# Altium PCB CCZynq.PcbDoc
Units mil, origin at the board's own origin, x right, y up, seen from the top; angles counter-clockwise.
Board outline 6000 x 4000 mil, 2 copper layers (Top Layer, Bottom Layer); 90 components, 76 nets, 723 pads, 0 vias.
Unrouted connection lines stored in the file: 337.
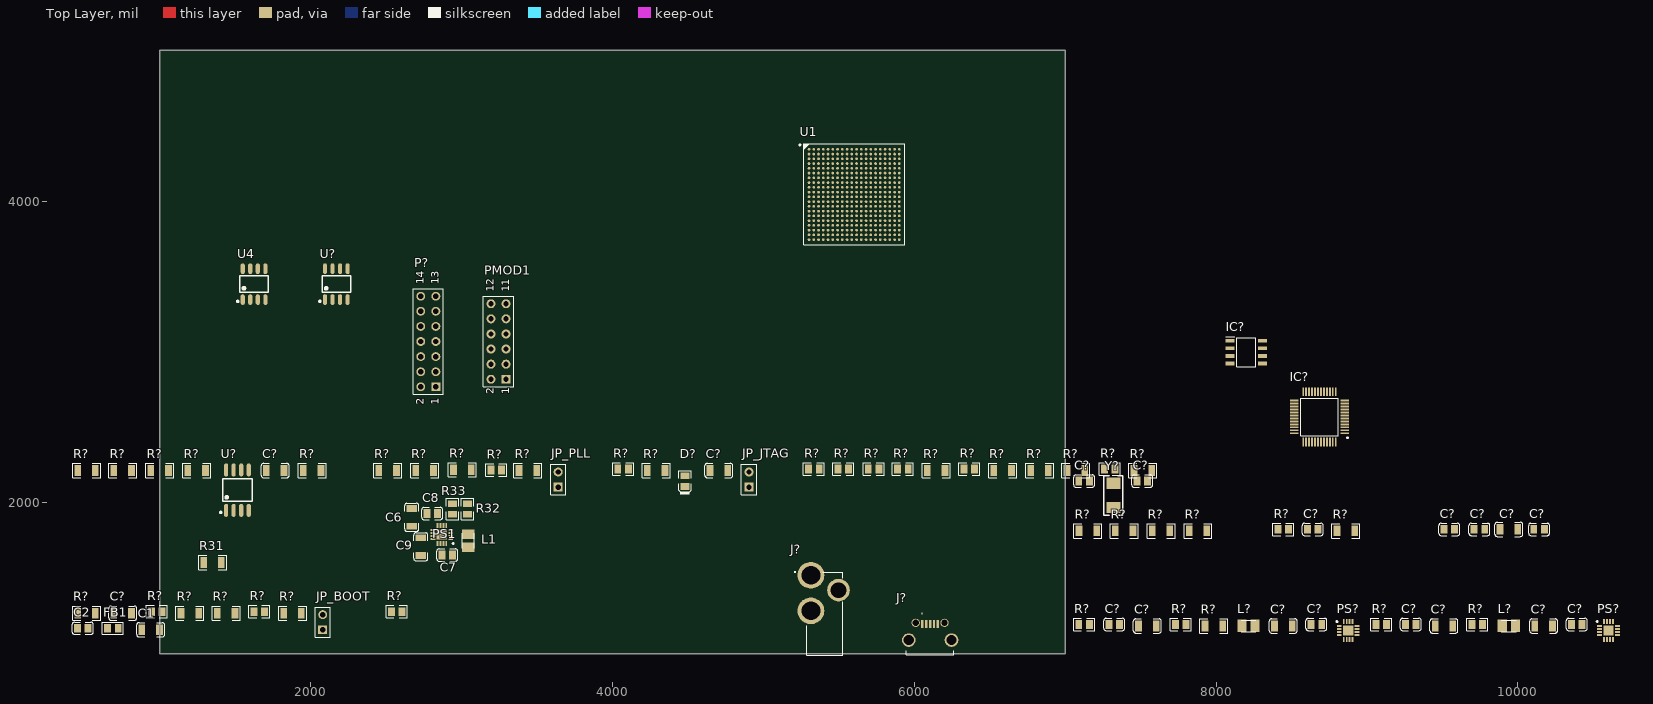
[diagram p0: Top Layer view]
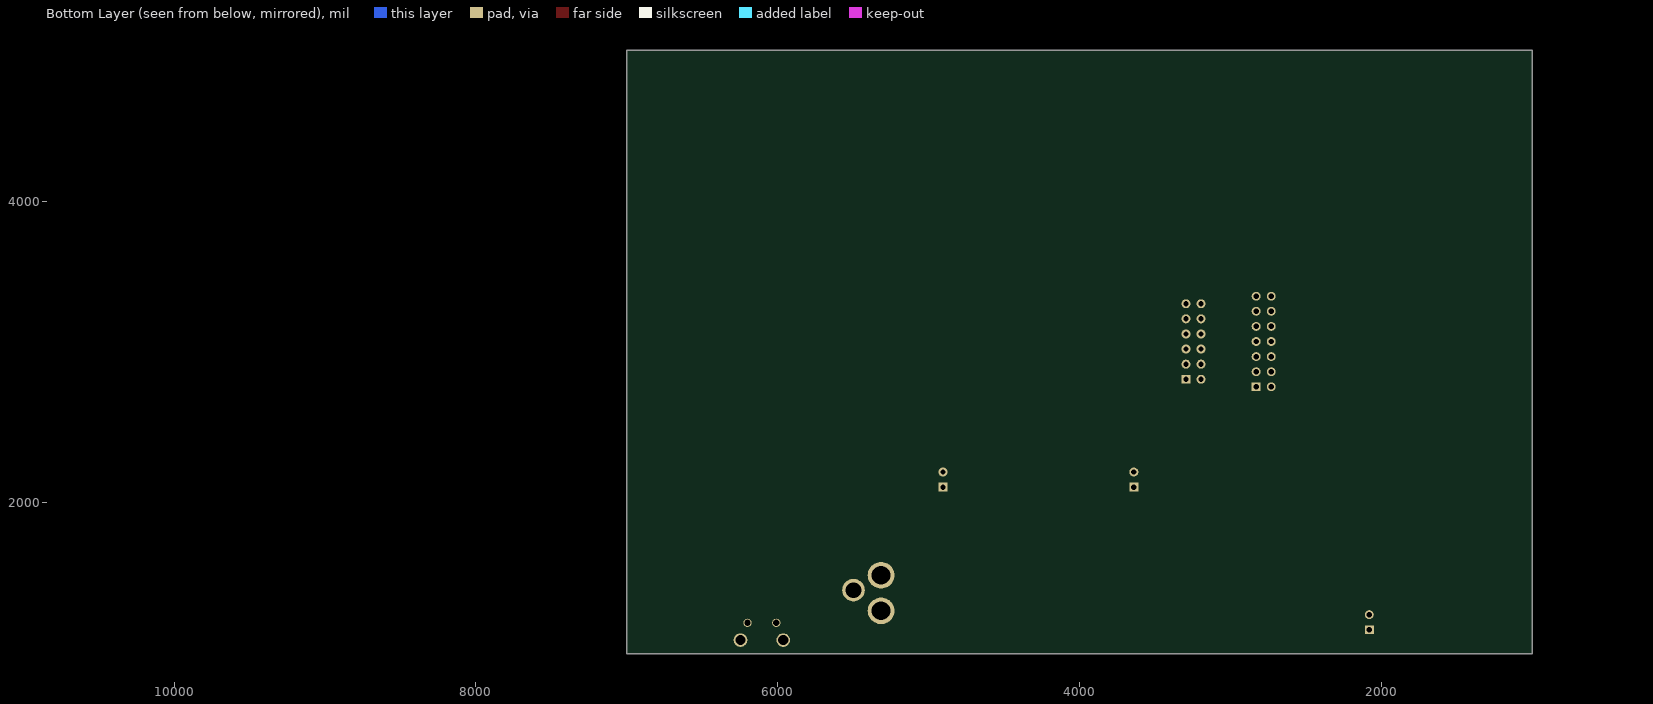
[diagram p1: Bottom Layer view, seen from below]

## Layer stack, top to bottom
Top Solder: solder mask 0.4, Solder Resist, Dk 3.5
Top Layer: signal copper 1.4
Dielectric 1: dielectric 12.6, FR-4, Dk 4.8
Bottom Layer: signal copper 1.4
Bottom Solder: solder mask 0.4, Solder Resist, Dk 3.5

## Board outline
1000,1000 7000,1000 7000,5000 1000,5000

## Design rules (kind name [scope] priority, off if disabled: settings)
Clearance [All] p1: gap=8 ignorepadtopadclearanceinfootprint=TRUE except(0: Arc-Hole Track-Hole SMDPad-Hole THPad-Hole Via-Hole Fill-Hole Poly-Hole Region-Hole Text-Hole)
DiffPairsRouting [All] p1: maxlimit=10 minlimit=10 mostfreqgap=10 toplayer_minwidth=15 toplayer_maxwidth=15 toplayer_prefwidth=15 bottomlayer_minwidth=15 bottomlayer_maxwidth=15 bottomlayer_prefwidth=15 maxuncoupledlength=500
HoleToHoleClearance [All] p1: gap=8 allowstackedmicrovias=TRUE
PolygonConnect [All] p1: connectstyle=Relief reliefconductorwidth=10 reliefentries=4 polygonreliefangle="90 Angle" airgapwidth=10
RoutingVias [All] p1: holewidth=28 width=50 viastyle="Through Hole" minholewidth=28 minwidth=50 maxholewidth=28 maxwidth=50
SilkToSilkClearance [All] p1: silktosilkclearance=0
SilkToSolderMaskClearance [IsPad] p1: minsilkscreentomaskgap=0 clearancetoexposedcopper=TRUE
SolderMaskExpansion [All] p1: expansion=4
Width [All] p1: maxlimit=50 minlimit=8 preferedwidth=8
26 further rules are at their usual default settings.

## Classes and differential pairs
component class Sheet5: C? IC? J? PMOD1 R? U4 Y?
component class Sheet4: C6 C7 C8 C9 C? J? L1 L? PS1 PS? R31 R32 R33 R?
component class Sheet3: U1
component class Sheet1: C1 C2 FB1
component class Sheet2: C? D? JP_BOOT JP_JTAG JP_PLL P? R? U?
differential pair NetC?_2: +NetC?_2 -NetC?_2

## Components (designator, comment, footprint, x,y, rotation, side; value= is the part's Value field where it differs from the comment)
C1 "100nF" 1206_C 940,1160 r0 top
C2 "47uF" 0805_C 490,1170 r0 top
C6 "100nF" 1206_C 2670,1905 r270 top
C7 "22uF" 0805_C 2905,1655 r0 top
C8 "3.3nF" 0805_C 2805,1930 r180 top
C9 "10uF" 1206_C 2730,1710 r90 top
C? "27pF" 0805_C 7510,2145 r0 top
C? "27pF" 0805_C 7125,2145 r0 top
C? "100nF" 1206_C 10170,1185 r0 top
C? "22uF" 0805_C 10390,1195 r0 top
C? "10uF" 1206_C 9510,1185 r0 top
C? "3.3nF" 0805_C 9290,1195 r0 top
C? "100nF" 1206_C 8445,1185 r0 top
C? "22uF" 0805_C 8665,1195 r0 top
C? "10uF" 1206_C 7545,1185 r0 top
C? "3.3nF" 0805_C 7325,1195 r0 top
C? "10uF" 1206_C 9940,1825 r0 top
C? "100nF" 0805_C 9745,1825 r0 top
C? "100nF" 0805_C 9545,1825 r0 top
C? "100nF" 0805_C 10140,1825 r0 top
C? "100nF" 0805_C 8640,1825 r0 top
C? "100nF" 1206_C 755,1270 r0 top
C? "100nF" 1206_C 1765,2215 r0 top
C? "100nF" 1206_C 4705,2215 r0 top
D? "翠绿 0805" 0805_LED_S1 4480,2145 r90 top
FB1 "600Ω ±25% 100MHz" 0805_L 690,1170 r0 top
IC? "93LC56B-I_SN" SOIC127P600X175-8N 8200,3000 r0 top
IC? "FT232HL-TRAY" QFP50P900X900X160-48N 8685,2570 r180 top
J? "DC-005-20A" DC00520A 5315,1521.22 r90 top
J? "U254-051T-4BHJ25-S2S" U254051T4BHJ25S2S 6105,1170 r0 top
JP_BOOT "Header 2" HDR1X2 2080,1160 r90 top
JP_JTAG "Header 2" HDR1X2 4905,2105 r90 top
JP_PLL "Header 2" HDR1X2 3640,2105 r90 top
L1 "252012CDMCDS2R2MC" INDPM2520X120N 3045,1750 r90 top
L? "252012CDMCDS2R2MC" INDPM2520X120N 9940,1185 r0 top
L? "252012CDMCDS2R2MC" INDPM2520X120N 8215,1185 r0 top
P? "JTAG Header" HDR2X7 2830,2770 r90 top
PMOD1 "Header 6X2" HDR2X6 3295,2820 r90 top
PS1 "TLV62130RGTR" QFN50P300X300X100-17N-D 2869.84,1790.94 r180 top
PS? "TLV62130RGTR" QFN50P300X300X100-17N-D 10600,1155 r0 top
PS? "TLV62130RGTR" QFN50P300X300X100-17N-D 8875,1155 r0 top
R31 "10KΩ" 1206_R 1350,1605 r0 top
R32 "4.99KΩ" 0805_R 3040,1960.04 r90 top
R33 "20KΩ" 0805_R 2940,1959.96 r270 top
R? "56.2KΩ" 0805_R 9730,1195 r0 top
R? "18KΩ" 0805_R 9095,1195 r0 top
R? "18.7KΩ" 0805_R 7765,1195 r0 top
R? "15KΩ" 0805_R 7125,1195 r0 top
R? "10KΩ" 1206_R 7985,1185 r0 top
R? "12.1KΩ" 0805_R 8445,1825 r0 top
R? "10KΩ" 1206_R 8860,1815 r0 top
R? "22Ω" 1206_R 7150,1815 r0 top
R? "22Ω" 1206_R 7880,1815 r0 top
R? "22Ω" 1206_R 7635,1815 r0 top
R? "22Ω" 1206_R 7390,1815 r0 top
R? "1KΩ" 1206_R 1880,1270 r0 top
R? "20KΩ" 0805_R 1660,1280 r0 top
R? "20KΩ" 0805_R 2570,1280 r0 top
R? "100KΩ" 1206_R 515,1270 r0 top
R? "33Ω" 0805_R 980,1280 r0 top
R? "10KΩ" 1206_R 1200,1270 r0 top
R? "10KΩ" 1206_R 1440,1270 r0 top
R? "100KΩ" 1206_R 6585,2215 r0 top
R? "20KΩ" 0805_R 5530,2225 r0 top
R? "4.7KΩ" 1206_R 2010,2215 r0 top
R? "20KΩ" 0805_R 3230,2218.86 r0 top
R? "1KΩ" 1206_R 3440,2215 r0 top
R? "4.7KΩ" 1206_R 3005,2220 r0 top
R? "1KΩ" 1206_R 4290,2215 r0 top
R? "20KΩ" 0805_R 4070,2225 r0 top
R? "20KΩ" 0805_R 5925,2225 r0 top
R? "4.7KΩ" 1206_R 2755,2215 r0 top
R? "20KΩ" 0805_R 6365,2225 r0 top
R? "47Ω" 0805_R 5335,2225 r0 top
R? "4.7KΩ" 1206_R 6145,2215 r0 top
R? "100KΩ" 1206_R 6830,2215 r0 top
R? "100KΩ" 1206_R 7515,2215 r0 top
R? "4.7KΩ" 1206_R 2510,2215 r0 top
R? "22Ω" 1206_R 515,2215 r0 top
R? "22Ω" 1206_R 1000,2215 r0 top
R? "4.7KΩ" 1206_R 7070,2215 r0 top
R? "330Ω" 0805_R 5730,2225 r0 top
R? "330Ω" 0805_R 7295,2225 r0 top
R? "22Ω" 1206_R 1245,2215 r0 top
R? "22Ω" 1206_R 755,2215 r0 top
U1 "XC7Z010-1CLG400I" CLG400 5601.77,4044.25 r0 top
U4 "ESP-PSRAM-64H" SOIC-8_150mil 1625,3450 r0 top
U? "W25Q128JVSIQTR" SOIC-8_208mil 1515,2085 r0 top
U? "SGM706-SYS8" SOIC-8_150mil 2170,3450 r0 top
Y? "12MHz" SMD-5032_2P 7320,2050 r90 top

## Footprints (in the part's own frame and the unit in brackets; to place one, negate y for a bottom-side part, rotate by r counter-clockwise, add the part's x,y. Pads: shape width x height; smd on the part's side, far side on the other; paste and mask are expansions set on the pad)
0805_C [mm]
  rect 1.16x1.47 smd: 1(-0.89,0) 2(0.89,0)
  silkscreen extent -1.77,-1.04 1.77,1.04, body extent -1,-0.62 1,0.63, height 0.77
0805_L [mm]
  rect 1.16x1.47 smd: 1(-0.89,0) 2(0.89,0)
  silkscreen extent -1.77,-1.04 1.77,1.03, body extent -1.02,-0.64 1.03,0.64, height 0.6
0805_LED_S1 [mm]
  rect 1.16x1.47 smd: A(0.89,0) K(-0.89,0)
  silkscreen extent -2.24,-1.04 1.77,1.03, body extent -1.01,-0.62 1.01,0.62, height 1.1
0805_R [mm]
  rect 1.16x1.47 smd: 1(-0.89,0) 2(0.89,0)
  silkscreen extent -1.77,-1.04 1.77,1.03, body extent -1,-0.62 1,0.63, height 0.49
1206_C [mm]
  rect 1.13x1.8 smd: 1(-1.49,0) 2(1.49,0)
  silkscreen extent -2.36,-1.2 2.35,1.2, body extent -1.6,-0.81 1.6,0.79, height 1
1206_R [mm]
  rect 1.13x1.8 smd: 1(-1.49,0) 2(1.49,0)
  silkscreen extent -2.36,-1.2 2.35,1.2, body extent -1.7,-0.86 1.65,0.87, height 0.85
CLG400 [mm] "BGA, 400-Balls, Body 17x17mm, Pitch 0.8mm"
  round 0.45 smd: A1(-7.6,7.6) A2(-6.8,7.6) A3(-6,7.6) A4(-5.2,7.6) A5(-4.4,7.6) A6(-3.6,7.6) A7(-2.8,7.6) A8(-2,7.6) A9(-1.2,7.6) A10(-0.4,7.6) A11(0.4,7.6) A12(1.2,7.6) A13(2,7.6) A14(2.8,7.6) A15(3.6,7.6) A16(4.4,7.6) A17(5.2,7.6) A18(6,7.6) A19(6.8,7.6) A20(7.6,7.6) B1(-7.6,6.8) B2(-6.8,6.8) B3(-6,6.8) B4(-5.2,6.8) B5(-4.4,6.8) B6(-3.6,6.8) B7(-2.8,6.8) B8(-2,6.8) B9(-1.2,6.8) B10(-0.4,6.8) B11(0.4,6.8) B12(1.2,6.8) B13(2,6.8) B14(2.8,6.8) B15(3.6,6.8) B16(4.4,6.8) B17(5.2,6.8) B18(6,6.8) B19(6.8,6.8) B20(7.6,6.8) C1(-7.6,6) C2(-6.8,6) C3(-6,6) C4(-5.2,6) C5(-4.4,6) C6(-3.6,6) C7(-2.8,6) C8(-2,6) C9(-1.2,6) C10(-0.4,6) C11(0.4,6) C12(1.2,6) C13(2,6) C14(2.8,6) C15(3.6,6) C16(4.4,6) C17(5.2,6) C18(6,6) C19(6.8,6) C20(7.6,6) D1(-7.6,5.2) D2(-6.8,5.2) D3(-6,5.2) D4(-5.2,5.2) D5(-4.4,5.2) D6(-3.6,5.2) D7(-2.8,5.2) D8(-2,5.2) D9(-1.2,5.2) D10(-0.4,5.2) D11(0.4,5.2) D12(1.2,5.2) D13(2,5.2) D14(2.8,5.2) D15(3.6,5.2) D16(4.4,5.2) D17(5.2,5.2) D18(6,5.2) D19(6.8,5.2) D20(7.6,5.2) E1(-7.6,4.4) E2(-6.8,4.4) E3(-6,4.4) E4(-5.2,4.4) E5(-4.4,4.4) E6(-3.6,4.4) E7(-2.8,4.4) E8(-2,4.4) E9(-1.2,4.4) E10(-0.4,4.4) E11(0.4,4.4) E12(1.2,4.4) E13(2,4.4) E14(2.8,4.4) E15(3.6,4.4) E16(4.4,4.4) E17(5.2,4.4) E18(6,4.4) E19(6.8,4.4) E20(7.6,4.4) F1(-7.6,3.6) F2(-6.8,3.6) F3(-6,3.6) F4(-5.2,3.6) F5(-4.4,3.6) F6(-3.6,3.6) F7(-2.8,3.6) F8(-2,3.6) F9(-1.2,3.6) F10(-0.4,3.6) F11(0.4,3.6) F12(1.2,3.6) F13(2,3.6) F14(2.8,3.6) F15(3.6,3.6) F16(4.4,3.6) F17(5.2,3.6) F18(6,3.6) F19(6.8,3.6) F20(7.6,3.6) G1(-7.6,2.8) G2(-6.8,2.8) G3(-6,2.8) G4(-5.2,2.8) G5(-4.4,2.8) G6(-3.6,2.8) G7(-2.8,2.8) G8(-2,2.8) G9(-1.2,2.8) G10(-0.4,2.8) G11(0.4,2.8) G12(1.2,2.8) G13(2,2.8) G14(2.8,2.8) G15(3.6,2.8) G16(4.4,2.8) G17(5.2,2.8) G18(6,2.8) G19(6.8,2.8) G20(7.6,2.8) H1(-7.6,2) H2(-6.8,2) H3(-6,2) H4(-5.2,2) H5(-4.4,2) H6(-3.6,2) H7(-2.8,2) H8(-2,2) H9(-1.2,2) H10(-0.4,2) H11(0.4,2) H12(1.2,2) H13(2,2) H14(2.8,2) H15(3.6,2) H16(4.4,2) H17(5.2,2) H18(6,2) H19(6.8,2) H20(7.6,2) J1(-7.6,1.2) J2(-6.8,1.2) J3(-6,1.2) J4(-5.2,1.2) J5(-4.4,1.2) J6(-3.6,1.2) J7(-2.8,1.2) J8(-2,1.2) J9(-1.2,1.2) J10(-0.4,1.2) J11(0.4,1.2) J12(1.2,1.2) J13(2,1.2) J14(2.8,1.2) J15(3.6,1.2) J16(4.4,1.2) J17(5.2,1.2) J18(6,1.2) J19(6.8,1.2) J20(7.6,1.2) K1(-7.6,0.4) K2(-6.8,0.4) K3(-6,0.4) K4(-5.2,0.4) K5(-4.4,0.4) K6(-3.6,0.4) K7(-2.8,0.4) K8(-2,0.4) K9(-1.2,0.4) K10(-0.4,0.4) K11(0.4,0.4) K12(1.2,0.4) K13(2,0.4) K14(2.8,0.4) K15(3.6,0.4) K16(4.4,0.4) K17(5.2,0.4) K18(6,0.4) K19(6.8,0.4) K20(7.6,0.4) L1(-7.6,-0.4) L2(-6.8,-0.4) L3(-6,-0.4) L4(-5.2,-0.4) L5(-4.4,-0.4) L6(-3.6,-0.4) L7(-2.8,-0.4) L8(-2,-0.4) L9(-1.2,-0.4) L10(-0.4,-0.4) L11(0.4,-0.4) L12(1.2,-0.4) L13(2,-0.4) L14(2.8,-0.4) L15(3.6,-0.4) L16(4.4,-0.4) L17(5.2,-0.4) L18(6,-0.4) L19(6.8,-0.4) L20(7.6,-0.4) M1(-7.6,-1.2) M2(-6.8,-1.2) M3(-6,-1.2) M4(-5.2,-1.2) M5(-4.4,-1.2) M6(-3.6,-1.2) M7(-2.8,-1.2) M8(-2,-1.2) M9(-1.2,-1.2) M10(-0.4,-1.2) M11(0.4,-1.2) M12(1.2,-1.2) M13(2,-1.2) M14(2.8,-1.2) M15(3.6,-1.2) M16(4.4,-1.2) M17(5.2,-1.2) M18(6,-1.2) M19(6.8,-1.2) M20(7.6,-1.2) N1(-7.6,-2) N2(-6.8,-2) N3(-6,-2) N4(-5.2,-2) N5(-4.4,-2) N6(-3.6,-2) N7(-2.8,-2) N8(-2,-2) N9(-1.2,-2) N10(-0.4,-2) N11(0.4,-2) N12(1.2,-2) N13(2,-2) N14(2.8,-2) N15(3.6,-2) N16(4.4,-2) N17(5.2,-2) N18(6,-2) N19(6.8,-2) N20(7.6,-2) P1(-7.6,-2.8) P2(-6.8,-2.8) P3(-6,-2.8) P4(-5.2,-2.8) P5(-4.4,-2.8) P6(-3.6,-2.8) P7(-2.8,-2.8) P8(-2,-2.8) P9(-1.2,-2.8) P10(-0.4,-2.8) P11(0.4,-2.8) P12(1.2,-2.8) P13(2,-2.8) P14(2.8,-2.8) P15(3.6,-2.8) P16(4.4,-2.8) P17(5.2,-2.8) P18(6,-2.8) P19(6.8,-2.8) P20(7.6,-2.8) R1(-7.6,-3.6) R2(-6.8,-3.6) R3(-6,-3.6) R4(-5.2,-3.6) R5(-4.4,-3.6) R6(-3.6,-3.6) R7(-2.8,-3.6) R8(-2,-3.6) R9(-1.2,-3.6) R10(-0.4,-3.6) R11(0.4,-3.6) R12(1.2,-3.6) R13(2,-3.6) R14(2.8,-3.6) R15(3.6,-3.6) R16(4.4,-3.6) R17(5.2,-3.6) R18(6,-3.6) R19(6.8,-3.6) R20(7.6,-3.6) T1(-7.6,-4.4) T2(-6.8,-4.4) T3(-6,-4.4) T4(-5.2,-4.4) T5(-4.4,-4.4) T6(-3.6,-4.4) T7(-2.8,-4.4) T8(-2,-4.4) T9(-1.2,-4.4) T10(-0.4,-4.4) T11(0.4,-4.4) T12(1.2,-4.4) T13(2,-4.4) T14(2.8,-4.4) T15(3.6,-4.4) T16(4.4,-4.4) T17(5.2,-4.4) T18(6,-4.4) T19(6.8,-4.4) T20(7.6,-4.4) U1(-7.6,-5.2) U2(-6.8,-5.2) U3(-6,-5.2) U4(-5.2,-5.2) U5(-4.4,-5.2) U6(-3.6,-5.2) U7(-2.8,-5.2) U8(-2,-5.2) U9(-1.2,-5.2) U10(-0.4,-5.2) U11(0.4,-5.2) U12(1.2,-5.2) U13(2,-5.2) U14(2.8,-5.2) U15(3.6,-5.2) U16(4.4,-5.2) U17(5.2,-5.2) U18(6,-5.2) U19(6.8,-5.2) U20(7.6,-5.2) V1(-7.6,-6) V2(-6.8,-6) V3(-6,-6) V4(-5.2,-6) V5(-4.4,-6) V6(-3.6,-6) V7(-2.8,-6) V8(-2,-6) V9(-1.2,-6) V10(-0.4,-6) V11(0.4,-6) V12(1.2,-6) V13(2,-6) V14(2.8,-6) V15(3.6,-6) V16(4.4,-6) V17(5.2,-6) V18(6,-6) V19(6.8,-6) V20(7.6,-6) W1(-7.6,-6.8) W2(-6.8,-6.8) W3(-6,-6.8) W4(-5.2,-6.8) W5(-4.4,-6.8) W6(-3.6,-6.8) W7(-2.8,-6.8) W8(-2,-6.8) W9(-1.2,-6.8) W10(-0.4,-6.8) W11(0.4,-6.8) W12(1.2,-6.8) W13(2,-6.8) W14(2.8,-6.8) W15(3.6,-6.8) W16(4.4,-6.8) W17(5.2,-6.8) W18(6,-6.8) W19(6.8,-6.8) W20(7.6,-6.8) Y1(-7.6,-7.6) Y2(-6.8,-7.6) Y3(-6,-7.6) Y4(-5.2,-7.6) Y5(-4.4,-7.6) Y6(-3.6,-7.6) Y7(-2.8,-7.6) Y8(-2,-7.6) Y9(-1.2,-7.6) Y10(-0.4,-7.6) Y11(0.4,-7.6) Y12(1.2,-7.6) Y13(2,-7.6) Y14(2.8,-7.6) Y15(3.6,-7.6) Y16(4.4,-7.6) Y17(5.2,-7.6) Y18(6,-7.6) Y19(6.8,-7.6) Y20(7.6,-7.6)
  silkscreen extent -9.27,-8.5 8.5,8.5, body extent -8.5,-8.5 8.5,8.5, height 1.6
DC00520A [mm]
  round 4.5 hole 3.15: 1(0,0) 2(-6,0)
  round 3.8 hole 2.625: 3(-2.5,-4.65)
  silkscreen extent -13.5,-5.33 0.6,2.72, body extent -13.5,-5.86 1.48,1.47, height 11.1
HDR1X2 [mm] "Connector; Header; 2 Position"
  rect 1.5x1.5 hole 0.9: 1(0,0)
  round 1.5 hole 0.9: 2(2.54,0)
  silkscreen extent -1.27,-1.27 3.81,1.27
HDR2X6 [mm] "Connector; Header; 6x2 Position"
  rect 1.5x1.5 hole 0.9: 1(0,0)
  round 1.5 hole 0.9: 2(0,2.54) 3(2.54,0) 4(2.54,2.54) 5(5.08,0) 6(5.08,2.54) 7(7.62,0) 8(7.62,2.54) 9(10.16,0) 10(10.16,2.54) 11(12.7,0) 12(12.7,2.54)
  silkscreen extent -1.27,-1.27 13.97,3.81
HDR2X7 [mm] "Connector; Header; 7x2 Position"
  rect 1.5x1.5 hole 0.9: 1(0,0)
  round 1.5 hole 0.9: 2(0,2.54) 3(2.54,0) 4(2.54,2.54) 5(5.08,0) 6(5.08,2.54) 7(7.62,0) 8(7.62,2.54) 9(10.16,0) 10(10.16,2.54) 11(12.7,0) 12(12.7,2.54) 13(15.24,0) 14(15.24,2.54)
  silkscreen extent -1.27,-1.27 16.51,3.81
INDPM2520X120N [mm]
  rect 1.55x2.1 smd: 1(-1.1,0) 2(1.1,0)
  silkscreen extent -1.25,-1 1.25,1, body extent -1.25,-1 1.25,1, height 1.2
QFN50P300X300X100-17N-D [mm]
  rect 0.8x0.3 smd: 1(-1.5,0.75) 2(-1.5,0.25) 3(-1.5,-0.25) 4(-1.5,-0.75) 9(1.5,-0.75) 10(1.5,-0.25) 11(1.5,0.25) 12(1.5,0.75)
  rect 0.3x0.8 smd: 5(-0.75,-1.5) 6(-0.25,-1.5) 7(0.25,-1.5) 8(0.75,-1.5) 13(0.75,1.5) 14(0.25,1.5) 15(-0.25,1.5) 16(-0.75,1.5)
  rect 1.75x1.75 smd: 17(0,0)
  silkscreen extent -2.02,1.38 -1.78,1.62, body extent -1.55,-1.55 1.55,1.55, height 1
QFP50P900X900X160-48N [mm]
  rect 1.475x0.3 smd: 1(-4.238,2.75) 2(-4.238,2.25) 3(-4.238,1.75) 4(-4.238,1.25) 5(-4.238,0.75) 6(-4.238,0.25) 7(-4.238,-0.25) 8(-4.238,-0.75) 9(-4.238,-1.25) 10(-4.238,-1.75) 11(-4.238,-2.25) 12(-4.238,-2.75) 25(4.238,-2.75) 26(4.238,-2.25) 27(4.238,-1.75) 28(4.238,-1.25) 29(4.238,-0.75) 30(4.238,-0.25) 31(4.238,0.25) 32(4.238,0.75) 33(4.238,1.25) 34(4.238,1.75) 35(4.238,2.25) 36(4.238,2.75)
  rect 0.3x1.475 smd: 13(-2.75,-4.238) 14(-2.25,-4.238) 15(-1.75,-4.238) 16(-1.25,-4.238) 17(-0.75,-4.238) 18(-0.25,-4.238) 19(0.25,-4.238) 20(0.75,-4.238) 21(1.25,-4.238) 22(1.75,-4.238) 23(2.25,-4.238) 24(2.75,-4.238) 37(2.75,4.238) 38(2.25,4.238) 39(1.75,4.238) 40(1.25,4.238) 41(0.75,4.238) 42(0.25,4.238) 43(-0.25,4.238) 44(-0.75,4.238) 45(-1.25,4.238) 46(-1.75,4.238) 47(-2.25,4.238) 48(-2.75,4.238)
  silkscreen extent -4.85,-3.15 3.15,3.62, body extent -4.5,-4.5 4.5,4.5, height 1.6
SMD-5032_2P [mm]
  rect 1.9x2.4 smd: 1(-2.05,0) 2(2.05,0)
  silkscreen extent -3.32,-1.6 3.32,1.6
SOIC127P600X175-8N [mm]
  rect 1.525x0.65 smd: 1(-2.712,1.905) 2(-2.712,0.635) 3(-2.712,-0.635) 4(-2.712,-1.905) 5(2.712,-1.905) 6(2.712,-0.635) 7(2.712,0.635) 8(2.712,1.905)
  silkscreen extent -3.47,-2.45 1.6,2.58, body extent -3,-2.45 3,2.45, height 1.75
SOIC-8_150mil [mm]
  oval 0.7x1.8 smd: 1(-1.905,-2.6) 2(-0.635,-2.6) 3(0.635,-2.6) 4(1.905,-2.6) 5(1.905,2.6) 6(0.635,2.6) 7(-0.635,2.6) 8(-1.905,2.6)
  silkscreen extent -2.9,-3.05 2.4,1.4
SOIC-8_208mil [mm]
  oval 0.7x2.2 smd: 1(-1.905,-3.4) 2(-0.635,-3.4) 3(0.635,-3.4) 4(1.905,-3.4) 5(1.905,3.4) 6(0.635,3.4) 7(-0.635,3.4) 8(-1.905,3.4)
  silkscreen extent -2.95,-3.9 2.5,1.9
U254051T4BHJ25S2S [mm]
  rect 0.4x1.35 smd: 1(-1.3,0.675) 2(-0.65,0.675) 3(0,0.675) 4(0.65,0.675) 5(1.3,0.675)
  round 2.3 hole 1.7: MH1(-3.6,-2) MH2(3.6,-2)
  round 1.4 hole 1.07: MH3(2.425,0.9) MH4(-2.425,0.9)
  silkscreen extent -4,-4.5 4,2.55, body extent -4.34,-4.5 4.35,1.33, height 3

## Part data
C1 C6 C? C? C? C? C?: library part "1206 100nF (104) 10% 50V", "贴片电容", Package=1206, SuppliersPartNumber=C24497, ComponentLink1Description=供应商链接, ComponentLink1URL=http://www.szlcsc.com/product/details_25237.html, Supplier=LC
C2: library part "0805 47pF (470) 5% 50V", "贴片电容 47uF", Package=0805, SuppliersPartNumber=C14857, ComponentLink1Description=供应商链接, ComponentLink1URL=http://www.szlcsc.com/product/details_15529.html, Supplier=LC
C7 C? C?: library part "0805 22uF (226) 20% 25V", "贴片电容", Package=0805, SuppliersPartNumber=C45783, ComponentLink1Description=供应商链接, ComponentLink1URL=http://www.szlcsc.com/product/details_46786.html, Supplier=LC
C8 C? C?: library part "0805 3.3nF (332) 10% 50V", "贴片电容", Package=0805, SuppliersPartNumber=C53175, ComponentLink1Description=供应商链接, ComponentLink1URL=http://www.szlcsc.com/product/details_54191.html, Supplier=LC
C9 C? C? C?: library part "1206 10uF (106) 10% 50V", "贴片电容", Package=1206, SuppliersPartNumber=C13585, ComponentLink1Description=供应商链接, ComponentLink1URL=http://www.szlcsc.com/product/details_14236.html, Supplier=LC
C? C?: library part "0805 27pF (270) 5% 50V", "贴片电容", Package=0805, SuppliersPartNumber=C8031, ComponentLink1Description=供应商链接, ComponentLink1URL=http://www.szlcsc.com/product/details_8509.html, Supplier=LC
C? C? C? C?: library part "0805 100nF(104) 10% 50V", "贴片电容", Package=0805, SuppliersPartNumber=C49678, ComponentLink1Description=供应商链接, ComponentLink1URL=http://www.szlcsc.com/product/details_50686.html, Supplier=LC
D?: library part "0805 翠绿", "发光二极管", Package=0805, SuppliersPartNumber=C2297, ComponentLink1Description=供应商链接, ComponentLink1URL=http://www.szlcsc.com/product/details_2670.html, Supplier=LC
FB1: library part "0805 600Ω 25% 100MHz", "贴片磁珠", Package=0805, SuppliersPartNumber=C1017, ComponentLink1Description=供应商链接, ComponentLink1URL=http://www.szlcsc.com/product/details_1369.html, Supplier=LC
IC?: "Integrated Circuit", Arrow Part Number=93LC56B-I/SN, Manufacturer_Name=Microchip, Mouser Part Number=579-93LC56BISN, Arrow Price/Stock=https://www.arrow.com/en/products/93lc56b-isn/microchip-technology, Datasheet Link=http://ww1.microchip.com/downloads/en/DeviceDoc/21794G.pdf, Height=1.75mm, Manufacturer_Part_Number=93LC56B-I/SN, Mouser Price/Stock=https://www.mouser.co.uk/ProductDetail/Microchip-Technology/93LC56B-I-SN?qs=JhC4kYev1ubTO3jC60ECfA%3D%3D
IC?: "Integrated Circuit", Manufacturer_Name="FTDI Chip", Mouser Part Number=895-FT232HL-TRAY, Arrow Part Number=FT232HL-TRAY, Arrow Price/Stock=https://www.arrow.com/en/products/ft232hl-tray/ftdi-chip, Datasheet Link=https://www.ftdichip.com/Support/Documents/DataSheets/ICs/DS_FT232H.pdf, Height=1.6mm, Manufacturer_Part_Number=FT232HL-TRAY, Mouser Price/Stock=https://www.mouser.co.uk/ProductDetail/FTDI/FT232HL-TRAY?qs=rzPzygjq8vJvP%252BgUCAJn1A%3D%3D
J?: "Connector", Manufacturer_Name="Korean Hroparts Elec", Datasheet Link=https://datasheet.lcsc.com/szlcsc/Korean-Hroparts-Elec-DC-005-20A_C130239.pdf, Height=11mm, Manufacturer_Part_Number=DC-005-20A
J?: "Connector", Manufacturer_Name="XKB Enterprise", Datasheet Link=https://datasheet.lcsc.com/szlcsc/2002271812_XKB-Enterprise-U254-051T-4BHJ25-S2S_C319163.pdf, Height=2.9mm, Manufacturer_Part_Number=U254-051T-4BHJ25-S2S
JP_BOOT JP_JTAG JP_PLL: "Header, 2-Pin", LatestRevisionDate=17-Jul-2002, LatestRevisionNote="Re-released for DXP Platform.", Publisher="Altium Limited"
L1 L? L?: "Inductor", Manufacturer_Name=Sumida, Manufacturer_Part_Number=252012CDMCDS‐2R2MC, Datasheet Link=https://products.sumida.com/products/pdf/252012CDMCDDS%20(en).pdf, Height=1.2mm
P?: library part "Header 7X2", "Header, 7-Pin, Dual row", LatestRevisionDate=17-Jul-2002, LatestRevisionNote="Re-released for DXP Platform.", Publisher="Altium Limited"
PMOD1: "Header, 6-Pin, Dual row", LatestRevisionDate=17-Jul-2002, LatestRevisionNote="Re-released for DXP Platform.", Publisher="Altium Limited"
PS1 PS? PS?: "Power Supply", Manufacturer_Name="Texas Instruments", Mouser Part Number=595-TLV62130RGTR, Arrow Part Number=TLV62130RGTR, Arrow Price/Stock=https://www.arrow.com/en/products/tlv62130rgtr/texas-instruments, Datasheet Link=http://www.ti.com/lit/gpn/tlv62130, Height=1mm, Manufacturer_Part_Number=TLV62130RGTR, Mouser Price/Stock=https://www.mouser.co.uk/ProductDetail/Texas-Instruments/TLV62130RGTR?qs=2UFnnMkojnVB1OajUwDmow%3D%3D
R31 R? R? R? R?: library part "1206 10KΩ (1002) 1%", "贴片电阻", Package=1206, SuppliersPartNumber=C17902, ComponentLink1Description=供应商链接, ComponentLink1URL=http://www.szlcsc.com/product/details_18590.html, Supplier=LC
R32: library part "0805 4.99KΩ (4991) 1%", "贴片电阻", Package=0805, SuppliersPartNumber=C17677, ComponentLink1Description=供应商链接, ComponentLink1URL=http://www.szlcsc.com/product/details_18365.html, Supplier=LC
R33 R? R? R? R? R? R? R?: library part "0805 20KΩ (2002) 1%", "贴片电阻", Package=0805, SuppliersPartNumber=C4328, ComponentLink1Description=供应商链接, ComponentLink1URL=http://www.szlcsc.com/product/details_4735.html, Supplier=LC
R?: library part "0805 56KΩ (5602) 1%", "贴片电阻 56.2k", Package=0805, SuppliersPartNumber=C17756, ComponentLink1Description=供应商链接, ComponentLink1URL=http://www.szlcsc.com/product/details_18444.html, Supplier=LC
R?: library part "0805 18KΩ (1802) 1%", "贴片电阻", Package=0805, SuppliersPartNumber=C17506, ComponentLink1Description=供应商链接, ComponentLink1URL=http://www.szlcsc.com/product/details_18194.html, Supplier=LC
R?: library part "0805 18KΩ (1802) 1%", "贴片电阻 18.7k", Package=0805, SuppliersPartNumber=C17506, ComponentLink1Description=供应商链接, ComponentLink1URL=http://www.szlcsc.com/product/details_18194.html, Supplier=LC
R?: library part "0805 15KΩ (1502) 1%", "贴片电阻", Package=0805, SuppliersPartNumber=C17475, ComponentLink1Description=供应商链接, ComponentLink1URL=http://www.szlcsc.com/product/details_18163.html, Supplier=LC
R?: library part "0805 12KΩ (1202) 1%", "贴片电阻 12.1k", Package=0805, SuppliersPartNumber=C17444, ComponentLink1Description=供应商链接, ComponentLink1URL=http://www.szlcsc.com/product/details_18132.html, Supplier=LC
R? R? R? R? R? R? R? R?: library part "1206 22Ω (22R0) 1%", "贴片电阻", Package=1206, SuppliersPartNumber=C17958, ComponentLink1Description=供应商链接, ComponentLink1URL=http://www.szlcsc.com/product/details_18646.html, Supplier=LC
R? R? R?: library part "1206 1KΩ (1001) 1%", "贴片电阻", Package=1206, SuppliersPartNumber=C4410, ComponentLink1Description=供应商链接, ComponentLink1URL=http://www.szlcsc.com/product/details_4817.html, Supplier=LC
R? R? R? R?: library part "1206 100KΩ (1003) 1%", "贴片电阻", Package=1206, SuppliersPartNumber=C17900, ComponentLink1Description=供应商链接, ComponentLink1URL=http://www.szlcsc.com/product/details_18588.html, Supplier=LC
R?: library part "0805 33Ω (33R0) 1%", "贴片电阻", Package=0805, SuppliersPartNumber=C17634, ComponentLink1Description=供应商链接, ComponentLink1URL=http://www.szlcsc.com/product/details_18322.html, Supplier=LC
R? R? R? R? R? R?: library part "1206 4.7KΩ (4701) 1%", "贴片电阻", Package=1206, SuppliersPartNumber=C17936, ComponentLink1Description=供应商链接, ComponentLink1URL=http://www.szlcsc.com/product/details_18624.html, Supplier=LC
R?: library part "0805 47Ω (47R0) 1%", "贴片电阻", Package=0805, SuppliersPartNumber=C17714, ComponentLink1Description=供应商链接, ComponentLink1URL=http://www.szlcsc.com/product/details_18402.html, Supplier=LC
R? R?: library part "0805 330Ω (3300) 1%", "贴片电阻", Package=0805, SuppliersPartNumber=C17630, ComponentLink1Description=供应商链接, ComponentLink1URL=http://www.szlcsc.com/product/details_18318.html, Supplier=LC
U1: "667 MHz Zynq?7000 AP SoC, 130 PS I/O, 100 FPGA I/O, 400-Ball BGA, Speed Grade 1, Industrial Grade, Pb-Free", Generic Part Number=XC7Z010, Manufacturer=Xilinx, Code_JEDEC=MO-275-MMAA-1, ComponentLink1Description=Datasheet, ComponentLink1URL=http://www.xilinx.com/support/documentation/data_sheets/ds190-Zynq-7000-Overview.pdf, ComponentLink2Description="Package Specification", ComponentLink2URL=http://www.xilinx.com/support/documentation/user_guides/ug865-Zynq-7000-Pkg-Pinout.pdf, ComponentLink3Description="DC and AC Switching Characteristics", ComponentLink3URL=http://www.xilinx.com/support/documentation/data_sheets/ds187-XC7Z010-XC7Z020-Data-Sheet.pdf, ComponentLink4Description="Package File", ComponentLink4URL=http://www.xilinx.com/support/packagefiles/z7packages/xc7z010clg400pkg.txt, ComponentLink5Description="Packaging and Pinout", ComponentLink5URL=http://www.xilinx.com/support/documentation/user_guides/ug865-Zynq-7000-Pkg-Pinout.pdf, ComponentLink6Description="PCB and Layout Guide", ComponentLink6URL=http://www.xilinx.com/support/documentation/user_guides/ug483_7Series_PCB.pdf, DatasheetVersion=v1.2, Extensible Block RAM (# 36Kb Blocks)="240 KB (60)", Flip Flops=35200, LUTs=17600, Mounting Technology="Surface Mount", PackageDescription="Wire-Bond Chip-Scale BGA, Body 17 x 17 mm, 0.8 mm Pitch", PackageReference=CLG400, PackageVersion="Rev 1.1", PartNumber=XC7Z010-1CLG400I, RoHS=Pb-Free, Speed Grade=-1
U4: library part EEPROM/AT24C256C-SSHL-T_[C6482], "PSRAM, 150mil SOP-8", Package=SOIC-8_150mil, SuppliersPartNumber=C6482, ComponentLink1Description=供应商链接, ComponentLink1URL=http://www.szlcsc.com/product/details_6947.html, Supplier=LC
U?: library part W25Q128JVSIQTR_[C97521], "Flash ROM", Package=SOIC-8, SuppliersPartNumber=C97521, ComponentLink1Description=供应商链接, ComponentLink1URL=https://item.szlcsc.com/98729.html, Supplier=LC
U?: library part EEPROM/AT24C256C-SSHL-T_[C6482], "MCU  Supervisor, 150mil SOP-8", Package=SOIC-8_150mil, SuppliersPartNumber=C6482, ComponentLink1Description=供应商链接, ComponentLink1URL=http://www.szlcsc.com/product/details_6947.html, Supplier=LC
Y?: library part "SMD-5032_2P 11.0592MHZ 20PF 20PPM", "贴片晶振 12MHz", Package=SMD-5032_2P, SuppliersPartNumber=C52026, ComponentLink1Description=供应商链接, ComponentLink1URL=http://www.szlcsc.com/product/details_53039.html, Supplier=LC

## Nets (pads, with @x,y where several pads share a name; then routed paths per layer and width w, separated by ;. In a path a pad name is that pad's centre, name@x,y a point inside that pad or via, vN(x,y) a via of type N, cw(c..) or ccw(c..) an arc to the next point about the centre after c; other vN are vias at no path point)
1V0_PG: PS1.4 PS?.13@8904.53,1214.06 R31.2
1V8_PG: PS?.4@8815.94,1125.47 PS?.13@10629.53,1214.06 R?.2@8043.66,1185
3P3OUTV: IC?.39
3P3V: C?.2@8675.04,1825 IC?.12 IC?.24 IC?.46 R?.2@8918.66,1815
3V3_PG: PS?.4@10540.94,1125.47
D+: IC?.7@8851.85,2579.84 J?.3@6105,1196.57
D-: IC?.6@8851.85,2560.16 J?.2@6079.41,1196.57
EECLK: IC?.44
EECS: IC?.45
EEDATA: IC?.43
GND: C2.1 C6.1 C7.1 C8.1 C9.1 C?.1@696.34,1270 C?.1@1706.34,2215 C?.1@7089.96,2145 C?.1@7289.96,1195 C?.1@7474.96,2145 C?.1@7486.34,1185 C?.1@8386.34,1185 C?.1@8604.96,1825 C?.1@8629.96,1195 C?.1@9254.96,1195 C?.1@9451.34,1185 C?.1@9509.96,1825 C?.1@9709.96,1825 C?.1@9881.34,1825 C?.1@10111.34,1185 C?.1@10354.96,1195 C?.2@10175.04,1825 D?.K FB1.1 IC?.4@8851.85,2520.79 IC?.9 IC?.10 IC?.11 IC?.22 IC?.23 IC?.35 IC?.36 IC?.41 IC?.42 IC?.47 IC?.48 J?.5 J?.MH1 J?.MH2 J?.MH3 J?.MH4 P?.2 P?.4 P?.6 P?.8 P?.10 P?.12 P?.14 PS1.6 PS1.7 PS1.8 PS1.15 PS1.16 PS1.17 PS?.6 PS?.7 PS?.8 PS?.15 PS?.16 PS?.17 R33.1 R?.1@7089.96,1195 R?.1@8409.96,1825 R?.1@9059.96,1195 R?.2@1938.66,1270 R?.2@2605.04,1280 R?.2@3498.66,2215 R?.2@4348.66,2215 R?.2@5565.04,2225 R?.2@5960.04,2225 R?.2@6400.04,2225 R?.2@6643.66,2215 U1.A8 U1.A18 U1.B1 U1.B11 U1.C4 U1.C9 U1.C14 U1.D17 U1.E10 U1.E20 U1.F3 U1.F7 U1.F10 U1.F11 U1.G10 U1.G12 U1.G16 U1.H7 U1.H9 U1.H11 U1.H13 U1.H19 U1.J2 U1.J8 U1.J12 U1.K5 U1.K7 U1.K9 U1.K11 U1.K13 U1.K15 U1.L8 U1.L10 U1.L12 U1.L18 U1.M1 U1.M7 U1.M9 U1.M10 U1.M11 U1.M13 U1.N4 U1.N8 U1.N10 U1.N12 U1.N14 U1.P7 U1.P9 U1.P11 U1.P13 U1.P17 U1.R8 U1.R12 U1.R20 U1.T3 U1.T7 U1.T13 U1.U6 U1.U16 U1.V9 U1.V19 U1.W2 U1.W12 U1.Y5 U1.Y15 U?.3@2195,3347.64 U?.4@1590,1951.14
GNDADC: C1.2 C?.1@4646.34,2215 FB1.2 U1.J10 U1.K10
JF1: U1.E8
JF2: U1.E9
JF3: U1.C6
JF4: U1.D9
JF7: U1.E6
JF8: U1.B5
JF9: U1.C5
JF10: U1.C8
NetC1_1: C1.1 U1.J9
NetC8_2: C8.2 PS1.9
NetC?_2: C?.2@4763.66,2215 U1.L9
NetD?_A: D?.A R?.1@5694.96,2225
NetIC?_5: IC?.5@8851.85,2540.47 R?.2@8480.04,1825
NetIC?_13: IC?.13 R?.2@7208.66,1815
NetIC?_14: IC?.14 R?.2@7448.66,1815
NetIC?_15: IC?.15 R?.2@7693.66,1815
NetIC?_16: IC?.16 R?.2@7938.66,1815
NetIC?_34: IC?.34 R?.1@8801.34,1815
NetJP_BOOT_2: JP_BOOT.2 R?.1@1821.34,1270 R?.2@1695.04,1280
NetJP_JTAG_2: JP_JTAG.2 R?.1@4231.34,2215 R?.2@4105.04,2225
NetJP_PLL_2: JP_PLL.2 R?.1@3381.34,2215 R?.2@3265.04,2218.86
NetL1_2: L1.2 PS1.1 PS1.2 PS1.3
NetL?_2: L?.2@8258.31,1185 PS?.1@8815.94,1184.53 PS?.2@8815.94,1164.84 PS?.3@8815.94,1145.16
NetP?_3: P?.3 R?.1@2946.34,2220 R?.2@1303.66,2215
NetP?_5: P?.5 R?.1@2696.34,2215 R?.2@1058.66,2215
NetP?_7: P?.7 R?.2@813.66,2215
NetP?_9: P?.9 R?.1@2451.34,2215 R?.2@573.66,2215
NetPS1_5: PS1.5 R32.1 R33.2
NetPS?_5: PS?.5@8845.47,1095.94 R?.1@7729.96,1195 R?.2@7160.04,1195
NetR?_1: R?.1@944.96,1280 R?.1@1141.34,1270 U?.7@2145,3552.36
NetR?_1: R?.1@1381.34,1270 U?.1@2095,3347.64
NetR?_1: R?.1@5299.96,2225 U1.A5
NetR?_1: R?.1@6526.34,2215 R?.1@6771.34,2215 U1.E11
NetR?_1: R?.1@7456.34,2215 U1.B10
NetR?_1: R?.1@7011.34,2215 U1.R10
NetR?_2: R?.2@573.66,1270 U?.4@2245,3347.64
NetR?_2: R?.2@5765.04,2225 R?.2@7330.04,2225 U1.R11
NetR?_2: R?.2@6203.66,2215 U1.L6
NetU1_A3: U1.A3 U1.D2 U1.E5 U1.F8 U1.G1 U1.G9 U1.H4 U1.H8 U1.K8 U1.L3 U1.M8 U1.P2 U1.R5 U1.U1 U1.V4
NetU1_C19: U1.C19 U1.F18 U1.H14 U1.J17 U1.K20 U1.M16
NetU1_G11: U1.G11 U1.H10
NetU1_J11: U1.J11 U1.L11 U1.N9 U1.N11 U1.P10 U1.R9
PSCLK: U1.E7
RST.0: R?.2@1015.04,1280 U1.C7
SPI_CS: R?.1@1951.34,2215 U1.A7 U?.1@1440,1951.14
SPI_DQ0: R?.1@4034.96,2225 U1.B8 U?.5@1590,2218.86
SPI_DQ1: R?.1@6329.96,2225 U1.D6 U?.2@1490,1951.14
SPI_DQ2: R?.1@2534.96,1280 U1.B7 U?.3@1540,1951.14
SPI_DQ3: R?.1@1624.96,1280 U1.A6 U?.7@1490,2218.86
SPI_SCK: R?.1@3194.96,2218.86 R?.2@5370.04,2225 U?.6@1540,2218.86
TCK: R?.1@941.34,2215 R?.1@7091.34,1815 U1.F9
TDI: R?.1@456.34,2215 R?.1@7331.34,1815 U1.G6
TDO: R?.1@696.34,2215 R?.1@7576.34,1815 U1.F6
TMS: R?.1@1186.34,2215 R?.1@7821.34,1815 U1.J6
USB_5V: C?.1@10104.96,1825 C?.2@9998.66,1825 IC?.40 J?.1@6053.82,1196.57
VCC1V0: C6.2 C7.2 L1.1 PS1.14 R31.1 R32.2 U1.G7 U1.G13 U1.H12 U1.J7 U1.J13 U1.K12 U1.L7 U1.L13 U1.M12 U1.N7 U1.N13 U1.P8 U1.P12 U1.R7 U1.R13
VCC1V8: C?.2@8503.66,1185 C?.2@8700.04,1195 L?.1@8171.69,1185 PS?.14@8884.84,1214.06 R?.1@7926.34,1185 R?.2@7800.04,1195
VCC3V3: C2.2 C?.2@813.66,1270 C?.2@1823.66,2215 C?.2@10228.66,1185 C?.2@10425.04,1195 JP_BOOT.1 JP_JTAG.1 JP_PLL.1 L?.1@9896.69,1185 P?.1 PS?.14@10609.84,1214.06 R?.1@456.34,1270 R?.1@6086.34,2215 R?.1@7259.96,2225 R?.2@1258.66,1270 R?.2@1498.66,1270 R?.2@2068.66,2215 R?.2@2568.66,2215 R?.2@2813.66,2215 R?.2@3063.66,2220 R?.2@6888.66,2215 R?.2@7128.66,2215 R?.2@7573.66,2215 R?.2@9765.04,1195 U1.A13 U1.B6 U1.B16 U1.D7 U1.D12 U1.E15 U1.K6 U1.M6 U1.N6 U1.N19 U1.R6 U1.R15 U1.T6 U1.T8 U1.T18 U1.U11 U1.V14 U1.W7 U1.W17 U1.Y10 U1.Y20 U?.2@2145,3347.64 U?.8@1440,2218.86
VCC5V: C9.2 C?.2@7603.66,1185 C?.2@9568.66,1185 PS1.10 PS1.11 PS1.12 PS1.13 PS?.10 PS?.11 PS?.12
VCCPLL: U1.G8
VCFG0: R?.1@5889.96,2225 U1.D8
VCFG1: R?.1@5494.96,2225 U1.D5
VPHY: IC?.3@8851.85,2501.1
VPLL: IC?.8@8851.85,2599.53
pads on no net: C?.2@7160.04,2145 C?.2@7360.04,1195 C?.2@7545.04,2145 C?.2@9325.04,1195 C?.2@9580.04,1825 C?.2@9780.04,1825 IC?.1 IC?.2 IC?.3@8093.23,2975 IC?.4@8093.23,2925 IC?.5@8306.77,2925 IC?.6@8306.77,2975 IC?.7@8306.77,3025 IC?.8@8306.77,3075 IC?.17 IC?.18 IC?.19 IC?.20 IC?.21 IC?.25 IC?.26 IC?.27 IC?.28 IC?.29 IC?.30 IC?.31 IC?.32 IC?.33 IC?.37 IC?.38 J?.1@5315,1521.22 J?.2@5315,1285 J?.3@5498.07,1422.8 J?.4 L?.2@9983.31,1185 P?.11 P?.13 PMOD1.1 PMOD1.2 PMOD1.3 PMOD1.4 PMOD1.5 PMOD1.6 PMOD1.7 PMOD1.8 PMOD1.9 PMOD1.10 PMOD1.11 PMOD1.12 PS?.1@10540.94,1184.53 PS?.2@10540.94,1164.84 PS?.3@10540.94,1145.16 PS?.5@10570.47,1095.94 PS?.9 R?.1@9694.96,1195 R?.2@9130.04,1195 U1.A1 U1.A2 U1.A4 U1.A9 U1.A10 U1.A11 U1.A12 U1.A14 U1.A15 U1.A16 U1.A17 U1.A19 U1.A20 U1.B2 U1.B3 U1.B4 U1.B9 U1.B12 U1.B13 U1.B14 U1.B15 U1.B17 U1.B18 U1.B19 U1.B20 U1.C1 U1.C2 U1.C3 U1.C10 U1.C11 U1.C12 U1.C13 U1.C15 U1.C16 U1.C17 U1.C18 U1.C20 U1.D1 U1.D3 U1.D4 U1.D10 U1.D11 U1.D13 U1.D14 U1.D15 U1.D16 U1.D18 U1.D19 U1.D20 U1.E1 U1.E2 U1.E3 U1.E4 U1.E12 U1.E13 U1.E14 U1.E16 U1.E17 U1.E18 U1.E19 U1.F1 U1.F2 U1.F4 U1.F5 U1.F12 U1.F13 U1.F14 U1.F15 U1.F16 U1.F17 U1.F19 U1.F20 U1.G2 U1.G3 U1.G4 U1.G5 U1.G14 U1.G15 U1.G17 U1.G18 U1.G19 U1.G20 U1.H1 U1.H2 U1.H3 U1.H5 U1.H6 U1.H15 U1.H16 U1.H17 U1.H18 U1.H20 U1.J1 U1.J3 U1.J4 U1.J5 U1.J14 U1.J15 U1.J16 U1.J18 U1.J19 U1.J20 U1.K1 U1.K2 U1.K3 U1.K4 U1.K14 U1.K16 U1.K17 U1.K18 U1.K19 U1.L1 U1.L2 U1.L4 U1.L5 U1.L14 U1.L15 U1.L16 U1.L17 U1.L19 U1.L20 U1.M2 U1.M3 U1.M4 U1.M5 U1.M14 U1.M15 U1.M17 U1.M18 U1.M19 U1.M20 U1.N1 U1.N2 U1.N3 U1.N5 U1.N15 U1.N16 U1.N17 U1.N18 U1.N20 U1.P1 U1.P3 U1.P4 U1.P5 U1.P6 U1.P14 U1.P15 U1.P16 U1.P18 U1.P19 U1.P20 U1.R1 U1.R2 U1.R3 U1.R4 U1.R14 U1.R16 U1.R17 U1.R18 U1.R19 U1.T1 U1.T2 U1.T4 U1.T5 U1.T9 U1.T10 U1.T11 U1.T12 U1.T14 U1.T15 U1.T16 U1.T17 U1.T19 U1.T20 U1.U2 U1.U3 U1.U4 U1.U5 U1.U7 U1.U8 U1.U9 U1.U10 U1.U12 U1.U13 U1.U14 U1.U15 U1.U17 U1.U18 U1.U19 U1.U20 U1.V1 U1.V2 U1.V3 U1.V5 U1.V6 U1.V7 U1.V8 U1.V10 U1.V11 U1.V12 U1.V13 U1.V15 U1.V16 U1.V17 U1.V18 U1.V20 U1.W1 U1.W3 U1.W4 U1.W5 U1.W6 U1.W8 U1.W9 U1.W10 U1.W11 U1.W13 U1.W14 U1.W15 U1.W16 U1.W18 U1.W19 U1.W20 U1.Y1 U1.Y2 U1.Y3 U1.Y4 U1.Y6 U1.Y7 U1.Y8 U1.Y9 U1.Y11 U1.Y12 U1.Y13 U1.Y14 U1.Y16 U1.Y17 U1.Y18 U1.Y19 U4.1 U4.2 U4.3 U4.4 U4.5 U4.6 U4.7 U4.8 U?.5@2245,3552.36 U?.6@2195,3552.36 U?.8@2095,3552.36 Y?.1 Y?.2

## Text inside footprints (layer, text, board x,y; h text height)
P?: Top Overlay "2" at 2750,2650 h50 r90; Top Overlay "1" at 2850,2650 h50 r90; Top Overlay "14" at 2750,3450 h50 r90; Top Overlay "13" at 2850,3450 h50 r90
PMOD1: Top Overlay "12" at 3215,3400 h50 r90; Top Overlay "1" at 3315,3440 h50 r90; Top Overlay "1" at 3315,3400 h50 r90; Top Overlay "1" at 3315,2720 h50 r90; Top Overlay "2" at 3215,2720 h50 r90